# Altium PCB MPPTNGControlCarrier.PCBDOC
Units mm, origin at the board's own origin, x right, y up, seen from the top; angles counter-clockwise.
Board outline 64.45 x 100.2 mm, 2 copper layers (Top Layer, Bottom Layer); 22 components, 18 nets, 104 pads, 0 vias.
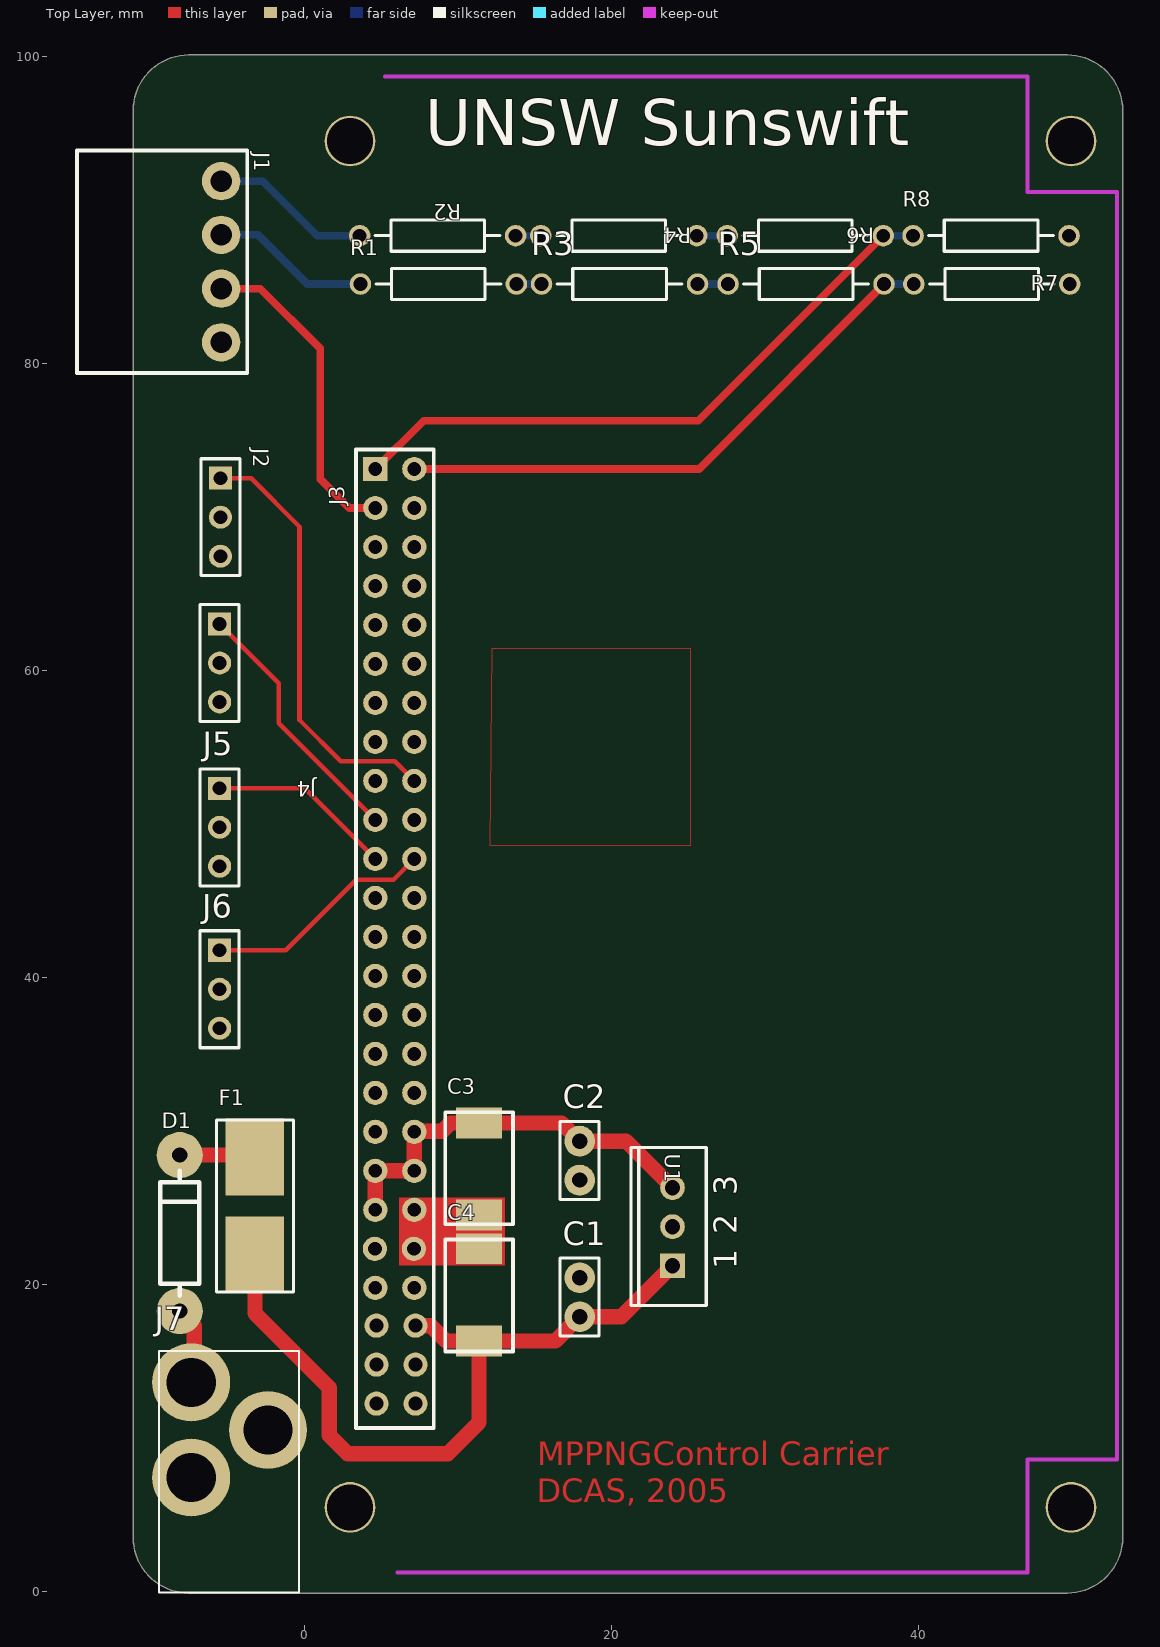
[diagram p0: Top Layer view]
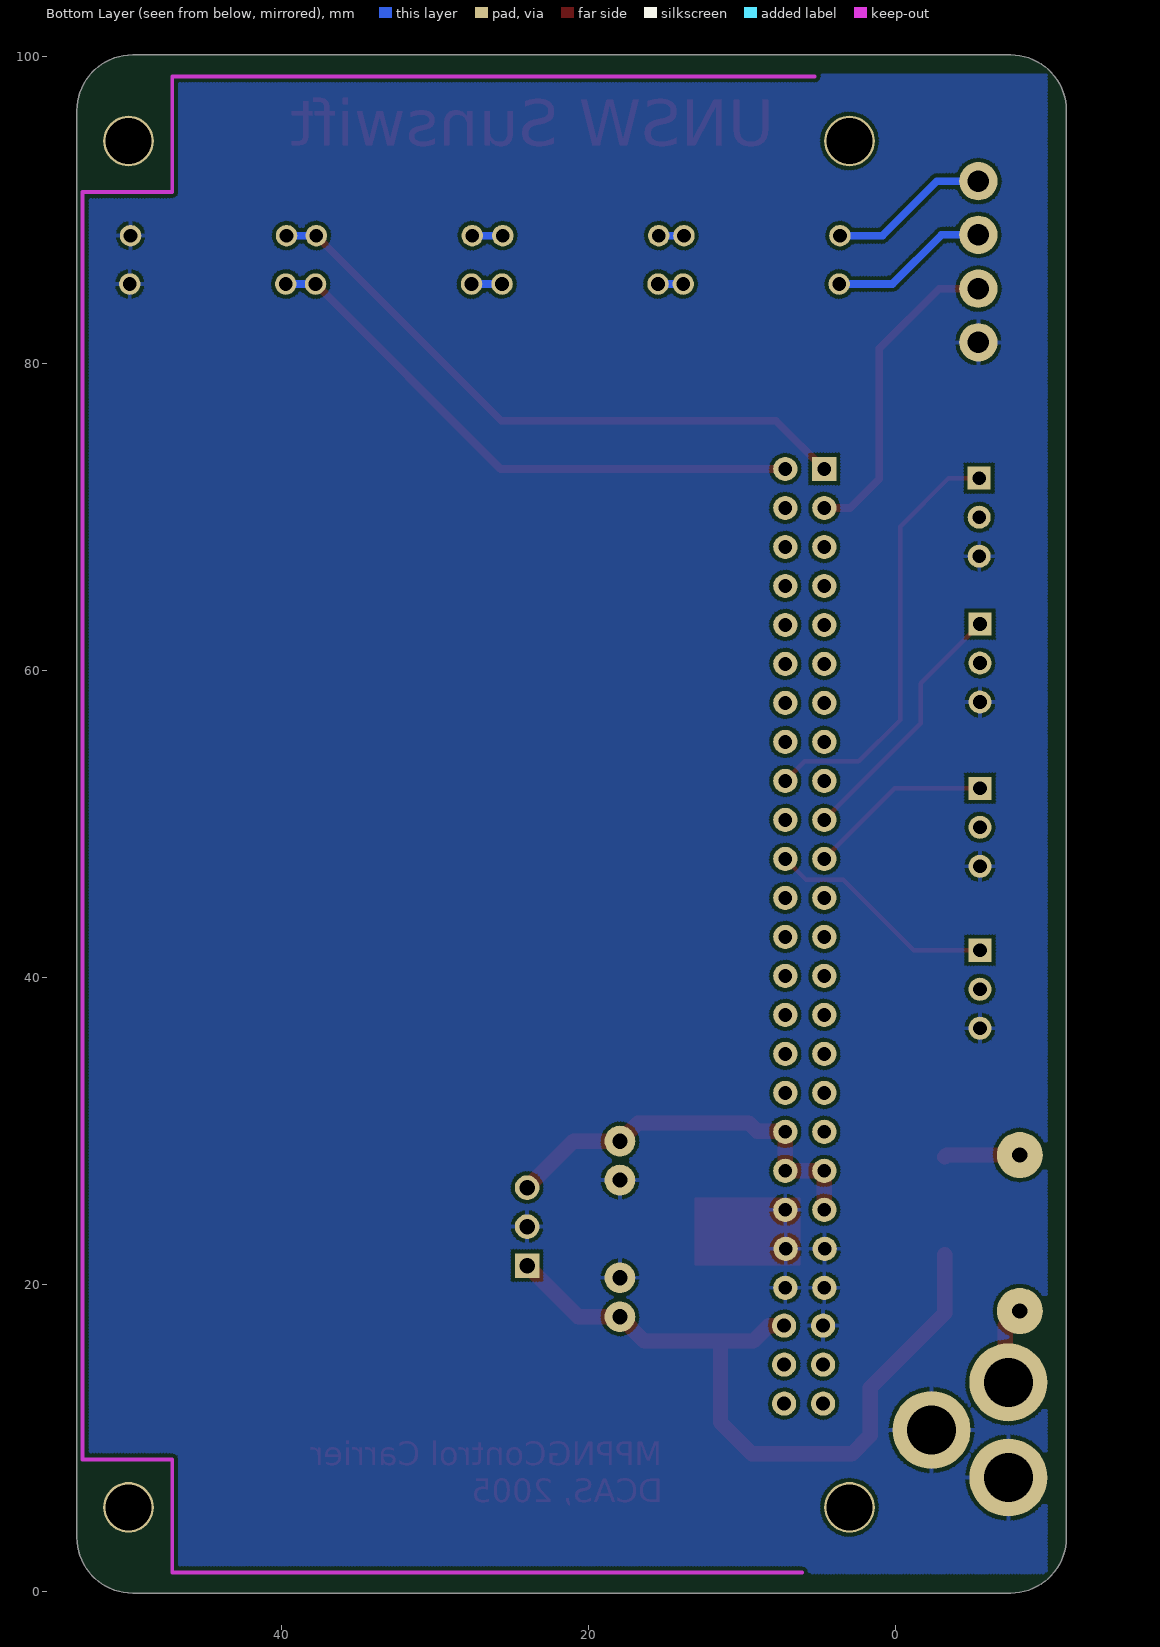
[diagram p1: Bottom Layer view, seen from below]

## Layer stack, top to bottom
Top Layer: signal copper 0.0356
Dielectric: dielectric 0.32, FR-4, Dk 4.8
Bottom Layer: signal copper 0.0356

## Board outline
-7.5,-0.077 cw(c-7.5,3.55) -11.127,3.55 -11.127,96.5 cw(c-7.5,96.5) -7.5,100.127 49.7,100.127 cw(c49.7,96.5) 53.327,96.5 53.327,3.55 cw(c49.7,3.55) 49.7,-0.077 cw(c49.7,0.05) 49.699,-0.077

## Design rules (kind name [scope] priority, off if disabled: settings)
Clearance [All] p1: gap=0.25
ComponentClearance [All] p1: gap=0.254 collisioncheckmode=0
HoleSize [All] p1: absolutevalues=TRUE maxlimit=10 minlimit=0.3 maxpercent=80.000 minpercent=20.000
MinimumAnnularRing [All] p1: minimumring=0.15
PlaneClearance [All] p1: clearance=0.5
PlaneConnect [All] p1: planeconnectstyle=Relief reliefexpansion=0.5 reliefentries=4 reliefconductorwidth=0.25 reliefairgap=0.25
PolygonConnect [All] p1: connectstyle=Relief reliefconductorwidth=0.25 reliefentries=4 polygonreliefangle="90 Angle"
RoutingCorners [All] p1: cornerstyle=45-Degree minsetback=3 maxsetback=3
RoutingLayers [All] p1: top layer=Horizontal bottom layer=Vertical
RoutingVias [All] p1: holewidth=0.4 width=0.8 viastyle="Through Hole" minholewidth=0.4 minwidth=0.7 maxholewidth=8 maxwidth=10
SolderMaskExpansion [All] p1: expansion=0.102
TestPointUsage [All] p1: valid=0 allowmultiple=FALSE
Testpoint [All] p1: side=15 testpointundercomponent=TRUE minsize=1.016 maxsize=2.54 preferedsize=1.524 minholesize=0 maxholesize=1.016 preferedholesize=0.813 testpointgrid=0.025 style=1023 order=1234567890
Width [All] p1: maxlimit=5 minlimit=0.2 preferedwidth=0.254 toplayer_prefwidth=1 bottomlayer_prefwidth=0.5 minimp=50.000000 maximp=50.000000 favimp=50.000000
12 further rules are at their usual default settings.

## Components (designator, comment, footprint, x,y, rotation, side; value= is the part's Value field where it differs from the comment)
C1 "100u" RAD-0.1 17.95,19.2 r90 top
C2 "100u" RAD-0.1 17.95,28.1 r270 top
C3 "CAP POL3" MCCT-CASED 11.4,30.55 r270 top
C4 "CAP POL3" MCCT-CASED 11.4,16.35 r90 top
D1 "DIODE" DIODE0.4 -8.1,18.3 r90 top
F1 "125mA/3A" LITTELFUSE-154 -3.2,25.15 r90 top
J1 "CON4" WEIDMULLER-SL3.5/4/90G -5.4,91.9 r270 top
J2 "CON3" HDR1X3 -5.45,72.55 r270 top
J3 "MPPT_NG" BL12/50M 4.64,73.152 r0 top
J4 "CON3" HDR1X3 -5.5,63.05 r270 top
J5 "CON3" HDR1X3 -5.5,52.35 r270 top
J6 "CON3" HDR1X3 -5.5,41.8 r270 top
J7 "DCSOCKET" DCSOCKET -7.35,13.65 r270 top
R1 "1M" AXIAL-0.4 8.75,85.2 r0 top
R2 "1M" AXIAL-0.4 8.7,88.35 r0 top
R3 "1M" AXIAL-0.4 20.55,85.2 r0 top
R4 "1M" AXIAL-0.4 20.5,88.35 r0 top
R5 "1M" AXIAL-0.4 32.7,85.2 r0 top
R6 "1M" AXIAL-0.4 32.65,88.35 r0 top
R7 "42k" AXIAL-0.4 44.8,85.2 r0 top
R8 "42k" AXIAL-0.4 44.75,88.35 r0 top
U1 "MC78M05CT" 221A-04 24,23.8 r90 top

## Footprints (in the part's own frame and the unit in brackets; to place one, negate y for a bottom-side part, rotate by r counter-clockwise, add the part's x,y. Pads: shape width x height; smd on the part's side, far side on the other; paste and mask are expansions set on the pad)
221A-04 [mm] "TO, Thru-Hole, Vertical, Heatsink Mounted; 3 In-Line Leads; Pitch 2.54 mm"
  rect 1.6x1.6 hole 1: 1(-2.54,0)
  round 1.6 hole 1: 2(0,0) 3(2.54,0)
  silkscreen extent -5.15,-2.2 5.15,2.7
AXIAL-0.4 [mm]
  round 1.4 hole 0.9: 1(-5.08,0) 2(5.08,0)
  silkscreen extent -4.06,-1.02 4.06,1.02
BL12/50M [mil]
  rect 62x62 hole 35.43: 1(0,0)
  round 62 hole 35.43: 2(100,0) 3(0,-100) 4(100,-100) 5(0,-200) 6(100,-200) 7(0,-300) 8(100,-300) 9(0,-400) 10(100,-400) 11(0,-500) 12(100,-500) 13(0,-600) 14(100,-600) 15(0,-700) 16(100,-700) 17(0,-800) 18(100,-800) 19(0,-900) 20(100,-900) 21(0,-1000) 22(100,-1000) 23(0,-1100) 24(100,-1100) 25(0,-1200) 26(100,-1200) 27(0,-1300) 28(100,-1300) 29(0,-1400) 30(100,-1400) 31(0,-1500) 32(100,-1500) 33(0,-1600) 34(100,-1600) 35(0,-1700) 36(100,-1700) 37(0,-1800) 38(100,-1800) 39(0,-1900) 40(100,-1900) 41(-1,-2000) 42(99,-2000) 43(0,-2100) 44(100,-2100) 45(3,-2197) 46(103,-2197) 47(3,-2297) 48(103,-2297) 49(3,-2397) 50(103,-2397)
  silkscreen extent -50,-2460 150,50
DCSOCKET [mm]
  round 5.08 hole 3.2: 1(0,0) 2(3.1,5) 3(6.2,0)
  silkscreen extent -2.05,-2.11 13.7,7.03
DIODE0.4 [mm]
  round 3 hole 1: A(0,0) K(10.16,0)
  silkscreen extent 1.02,-1.27 9.14,1.27
HDR1X3 [mm] "Connector; Header; 3 Position"
  rect 1.5x1.5 hole 0.9: 1(0,0)
  round 1.5 hole 0.9: 2(2.54,0) 3(5.08,0)
  silkscreen extent -1.27,-1.27 6.35,1.27
LITTELFUSE-154 [mm]
  rect 5x3.81 smd: 1(-3.185,0) 2(3.185,0)
  silkscreen extent -5.6,-2.51 5.6,2.5
MCCT-CASED [mm]
  rect 2x3 smd: 1(0,0) 2(6,0)
  silkscreen extent -0.7,-2.2 6.6,2.2
RAD-0.1 [mm]
  round 2 hole 1: 1(-1.27,0) 2(1.27,0)
  silkscreen extent -2.54,-1.27 2.54,1.27
WEIDMULLER-SL3.5/4/90G [mm]
  round 2.5 hole 1.4: 1(0,0) 2(3.5,0) 3(7,0) 4(10.5,0)
  silkscreen extent -2,-9.4 12.5,1.7

## Part data
C1 C2: library part CAP-POL, "Capacitor"
C3: library part CAP, "Capacitor"
C4: "Polarized Capacitor (Surface Mount)"
D1: "Diode"
F1: library part FUSE2, "Fuse"
J1 J5 J6: "Connector"
J2: library part CON4, "Connector"
J3: "Biel Control Board Interconnector"
J4: library part 430F_JTAG_TRITIUM, "Tritium JTAG interface for MSP430"
R1: library part RES1
R2 R3 R4 R5 R6 R7 R8: library part RES1, "Resistor"
U1: library part IL712, "IL712 Optoisolator - www.nve.com"

## Free pads (board coordinates)
  round 3.3 hole 3: 0(2.997,94.513) 1(2.997,5.512) 2(49.962,5.512) 3(49.962,94.513)

## Nets (pads, with @x,y where several pads share a name; then routed paths per layer and width w, separated by ;. In a path a pad name is that pad's centre, name@x,y a point inside that pad or via, vN(x,y) a via of type N, cw(c..) or ccw(c..) an arc to the next point about the centre after c; other vN are vias at no path point)
5V: C2.1 C3.1 J3.36 J3.37 J3.38 J3.39 U1.3 | length 26.3
  Top Layer w1: J3.39 J3.37 J3.38 ; J3.38@7.18,27.53 J3.36 ; J3.36@7.208,30 9,30 9.55,30.55 16.77,30.55 C2.1 20.97,29.37 U1.3
15V: C1.1 C4.1 F1.1 J3.46 U1.1 | length 49.4
  Top Layer w1: F1.1 -3.2,18.15 1.65,13.3 1.65,10.2 2.85,9 9.35,9 11.4,11.05 C4.1 ; J3.46 8.252,17.348 9.25,16.35 16.37,16.35 C1.1 20.67,17.93 U1.1
GND: C1.2 C2.2 C3.2 C4.2 J1.4 J2.3 J3.40 J3.41 J3.42 J3.43 J3.44 J3.45 J4.3 J5.3 J6.3 J7.2 J7.3 R7.2 R8.2 U1.2
NetD1_A: D1.A J7.1 | length 5.1
  Top Layer w1: D1.A -7.15,17.35 J7.1@-7.15,13.6
NetD1_K: D1.K F1.2 | length 5
  Top Layer w1: D1.K -3.325,28.46 F1.2
NetJ1_1: J1.1 R2.1 | length 10.5
  Bottom Layer w0.5: J1.1 -2.7,91.9 0.85,88.35 R2.1
NetJ1_2: J1.2 R1.1 | length 10.4
  Bottom Layer w0.5: J1.2 -3,88.4 0.2,85.2 R1.1
NetJ1_3: J1.3 J3.3 | length 20.9
  Top Layer w0.5: J1.3 -2.85,84.9 1.05,81 1.05,72.5 2.938,70.612 J3.3
NetJ2_1: J2.1 J3.18 | length 28.2
  Top Layer w0.3: J2.1 -3.45,72.55 -0.3,69.4 -0.3,56.8 2.4,54.1 5.912,54.1 J3.18
NetJ3_1: J3.1 R6.2 R8.1 | length 41.3
  Top Layer w0.5: J3.1 7.788,76.3 25.68,76.3 R6.2
  Bottom Layer w0.5: R6.2 R8.1
NetJ3_2: J3.2 R5.2 R7.1 | length 37.5
  Top Layer w0.5: J3.2 25.732,73.152 R5.2
  Bottom Layer w0.5: R5.2 R7.1
NetJ3_19: J3.19 J4.1 | length 17
  Top Layer w0.3: J4.1 -1.65,59.2 -1.65,56.582 J3.19
NetJ3_21: J3.21 J5.1 | length 12
  Top Layer w0.3: J5.1 0.042,52.35 J3.21
NetJ3_22: J3.22 J6.1 | length 15.1
  Top Layer w0.3: J6.1 -1.2,41.8 3.4,46.4 5.828,46.4 J3.22
NetR1_2: R1.2 R3.1 | length 1.6
  Bottom Layer w0.5: R1.2 R3.1
NetR2_2: R2.2 R4.1 | length 1.6
  Bottom Layer w0.5: R2.2 R4.1
NetR3_2: R3.2 R5.1 | length 2.2
  Bottom Layer w0.5: R3.2@25.5,85.05 25.5,85.07 R3.2 R5.1
NetR4_2: R4.2 R6.1 | length 2
  Bottom Layer w0.5: R4.2 R6.1
pads on no net: J2.2 J3.4 J3.5 J3.6 J3.7 J3.8 J3.9 J3.10 J3.11 J3.12 J3.13 J3.14 J3.15 J3.16 J3.17 J3.20 J3.23 J3.24 J3.25 J3.26 J3.27 J3.28 J3.29 J3.30 J3.31 J3.32 J3.33 J3.34 J3.35 J3.47 J3.48 J3.49 J3.50 J4.2 J5.2 J6.2

## Polygon pours and split planes (outlines as drawn)
no net on Top Layer (hatched 90Degree grid 0 track 0.2, remove dead copper): 12.1,48.642 25.2,48.642 25.2,61.45 12.212,61.45
GND on Bottom Layer (hatched 90Degree grid 0.2 track 0.25, remove dead copper): 47.05,98.75 47.05,91.15 52.8,91.15 52.8,8.65 47.2,8.65 47.2,1.25 -9.8,1.25 -9.8,98.8 47.1,98.8

## Keep-outs
Keep-Out Layer:
  lines w0.254: 5.27,98.73 47.117,98.73 47.117,91.186 52.959,91.186 52.959,8.636 47.117,8.636 47.117,1.3 ; 6.096,1.27 47.117,1.27

## Other copper
Top Layer:
  rectangle net GND: 6.2,21.25 13.1,25.7
  text "UNSW Sunswift" at 7.9,94.2 h3
  text "MPPNGControl Carrier" at 15.2,8.25 h1.52
  text "DCAS, 2005" at 15.15,5.85 h1.52

## Silkscreen, mask and mechanical layers (free items; w line width, h text height)
Top Overlay:
  text "UNSW Sunswift" at 7.9,94.25 h3
Mechanical 3:
  lines w0.254: -11,3.55 ccw(c-7.5,3.55) -7.5,0.05 49.7,0.05 ccw(c49.7,3.55) 53.2,3.55 53.2,96.5 ccw(c49.7,96.5) 49.7,100 -7.5,100 ccw(c-7.5,96.5) -11,96.5 -11,3.55
Mechanical 4:
  drawing of 309 lines, arcs and shapes, not listed
  text "6.0" at -41.675,99.19 h1
  text "5.0" at -41.675,73.79 h1
  text "4.0" at -41.675,48.39 h1
  text "3.0" at -41.675,22.99 h1
  text "2.0" at -41.675,-2.41 h1
  text "PLACE" at 73.768,-26.159 h1
  text "1.0" at -41.04,-27.81 h1
  text "TITLE:" at 9.443,-29.398 h1
  text "ENGINEER:" at -13.1,-29.715 h1
  text "LOGO" at 73.768,-29.715 h1
  text "MiningTiming Control Testboard" at 10.453,-33.458 h1
  text "HERE" at 73.768,-33.779 h1
  text "PHONE:" at -13.1,-34.478 h1
  text "ENGINEER:" at -13.1,-39.367 h1
  text "PART NO.:" at 9.76,-41.463 h1
  text "REV:" at 53.893,-41.463 h1
  text "DATE:" at 65.64,-41.463 h1
  text "01" at 58.338,-43.368 h1
  text ".PRINT_DATE" at 71.355,-43.368 h1
  text "PHONE:" at -13.1,-44.003 h1
  text "FILE NAME:" at -13.1,-48.511 h1
  text "LAYER:" at 33.636,-48.511 h1
  text "GERBER:" at 79.864,-48.511 h1
  text ".PCB_FILE_NAME_NO_PATH" at -2.94,-50.035 h1
  text ".LAYER_NAME" at 39.732,-50.035 h1
  text "0" at -38.817,-53.21 h1
  text "Y" at -32.15,-55.433 h1 r270
  text "X" at -28.022,-60.83 h1
  text "0" at -24.53,-65.91 h1 r270
  text "1.0" at 0.87,-65.91 h1 r270
  text "2.0" at 26.27,-65.91 h1 r270
  text "3.0" at 51.67,-65.91 h1 r270
  text "4.0" at 77.07,-65.91 h1 r270
  text "5.0" at 102.47,-65.91 h1 r270
  text "6.0" at 127.87,-65.91 h1 r270
  text "7.0" at 153.27,-65.91 h1 r270

## Text inside footprints (layer, text, board x,y; h text height)
U1: Top Overlay "3" at 28.175,25.84 h1.5 r90; Top Overlay "2" at 28.175,23.3 h1.5 r90; Top Overlay "1" at 28.175,21.01 h1.5 r90